# Altium PCB PCB2.PcbDoc
Units mil, origin at the board's own origin, x right, y up, seen from the top; angles counter-clockwise.
Board outline 6000 x 4000 mil, 2 copper layers (Top Layer, Bottom Layer); 15 components, 16 nets, 43 pads, 4 vias.
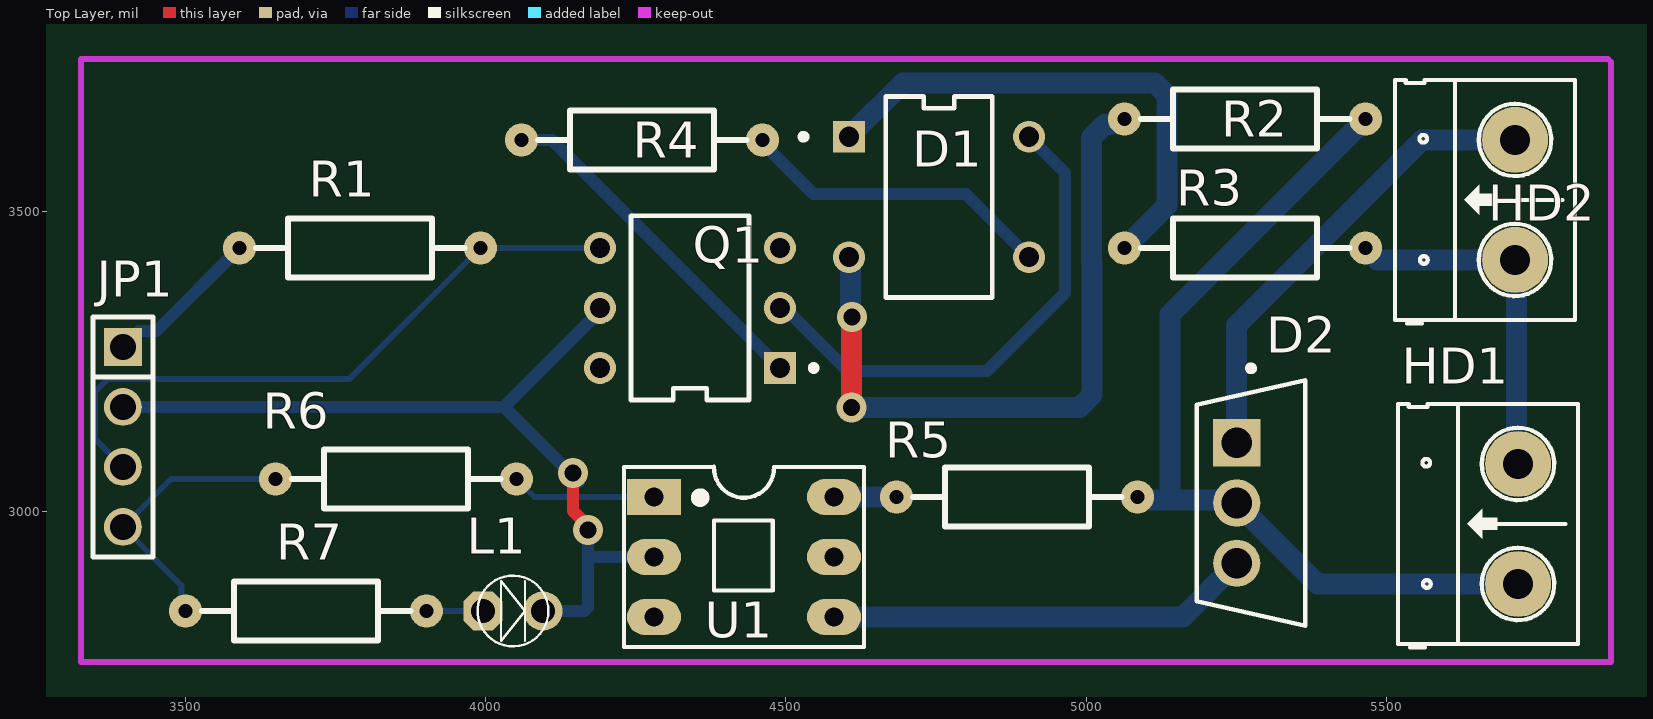
[diagram p0: Top Layer view]
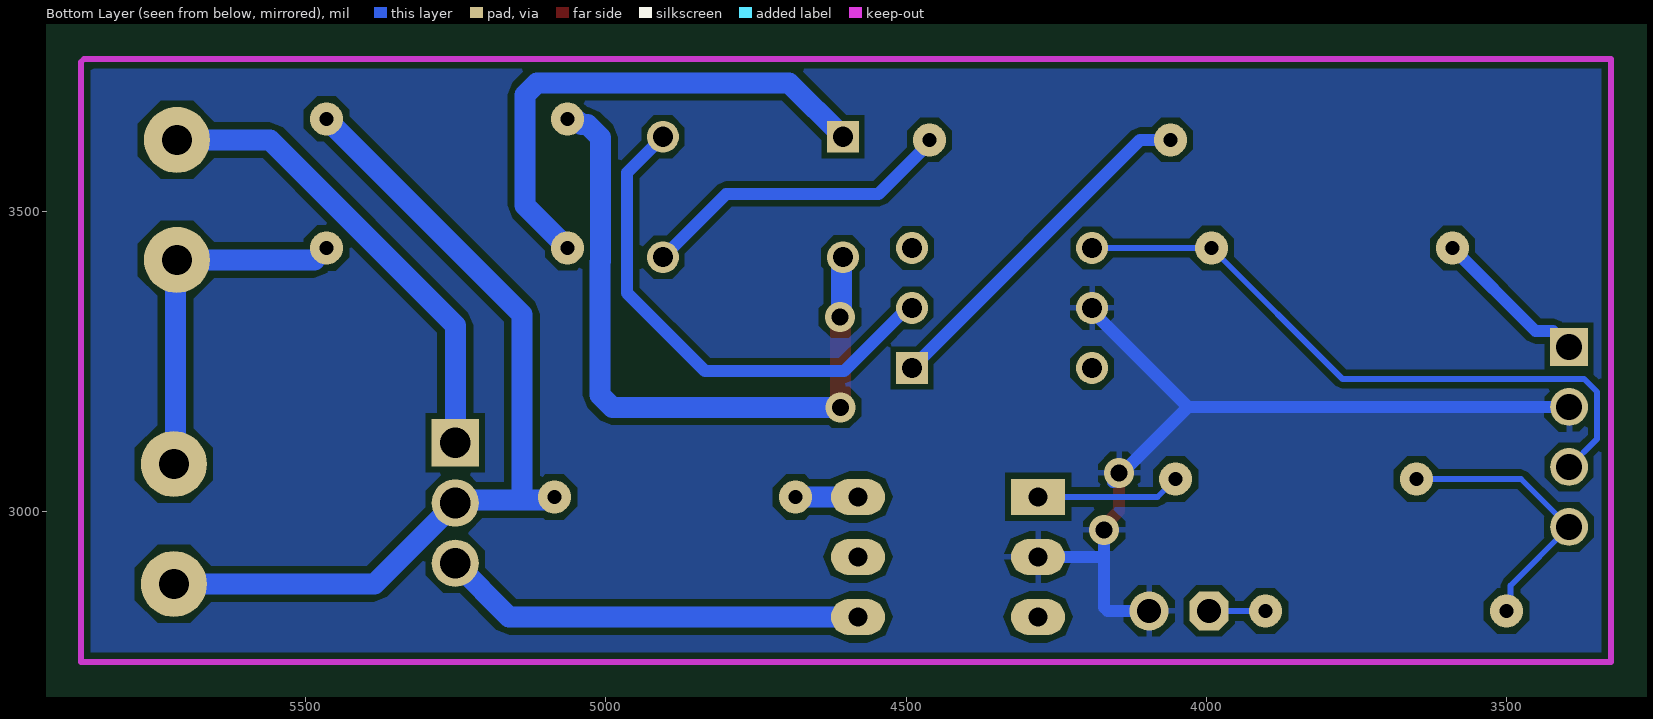
[diagram p1: Bottom Layer view, seen from below]
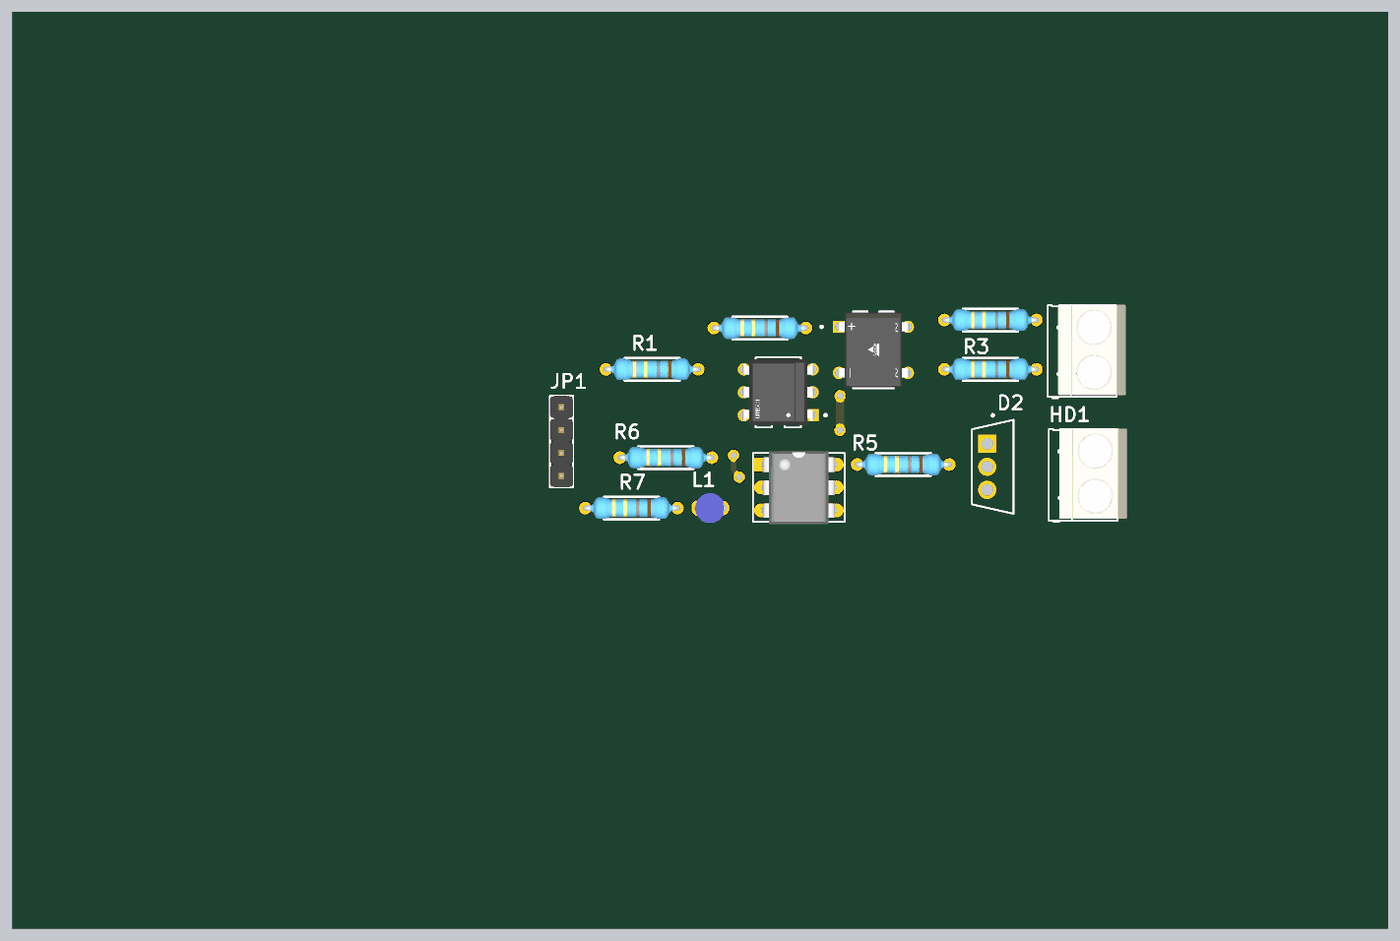
[diagram p2: 3D render of the assembled board from above, using the file's embedded part models]

## Layer stack, top to bottom
Top Solder: solder mask 0.4, Solder Resist, Dk 3.5
Top Layer: signal copper 1.4
Dielectric 1: dielectric 12.6, FR-4, Dk 4.8
Bottom Layer: signal copper 1.4
Bottom Solder: solder mask 0.4, Solder Resist, Dk 3.5

## Board outline
1000,1000 7000,1000 7000,5000 1000,5000

## Design rules (kind name [scope] priority, off if disabled: settings)
Clearance [All] p1: gap=10 ignorepadtopadclearanceinfootprint=FALSE
PolygonConnect [All] p1: connectstyle=Relief reliefconductorwidth=10 reliefentries=4 polygonreliefangle="90 Angle" airgapwidth=10
RoutingVias [All] p1: holewidth=28 width=50 viastyle="Through Hole" minholewidth=28 minwidth=50 maxholewidth=28 maxwidth=50
SolderMaskExpansion [All] p1: expansion=4 istentingtop=FALSE
Width [All] p1: maxlimit=10 minlimit=10 preferedwidth=10
30 further rules are at their usual default settings.

## Components (designator, comment, footprint, x,y, rotation, side; value= is the part's Value field where it differs from the comment)
D1 "DF04M-E3/45" FP-DF04M-E3-45-0 4755,3525 r0 top
D2 "BTA16-600CWRG" FP-TO-220AB_Ins-MFG 5275,3015 r0 top
HD1 "Header 2" HED2 5720,2880 r90 top
HD2 "Header 2" HED2 5715,3420 r90 top
JP1 "JP 1x4 2.54" "JP 1x4 DT" 3395,3275 r270 top
L1 "LED 3mm" LED-3MM-BLUE 4050,2835 r0 top
Q1 "4N25" FP-4N25-MFG 4340,3340 r180 top
R1 "10k" "tro vach 1/4w" 3790,3440 r0 top
R2 "47k" "tro vach 1/4w" 5265,3655 r0 top
R3 "47k" "tro vach 1/4w" 5265,3440 r0 top
R4 "10k" "tro vach 1/4w" 4260,3620 r0 top
R5 "1k" "tro vach 1/4w" 4885,3025 r0 top
R6 "330R" "tro vach 1/4w" 3850,3055 r0 top
R7 "220R" "tro vach 1/4w" 3700,2835 r0 top
U1 "MOC3021" DIP6/W0.3 4280,3025 r270 top

## Footprints (in the part's own frame and the unit in brackets; to place one, negate y for a bottom-side part, rotate by r counter-clockwise, add the part's x,y. Pads: shape width x height; smd on the part's side, far side on the other; paste and mask are expansions set on the pad)
DIP6/W0.3 [mil] "6 PIN, W 300mil, Pin to pin 100mil"
  rect 60x90 hole 31.5: 1(0,0)
  oval 60x90 hole 31.5: 2(100,0) 3(200,0) 4(200,300) 5(100,300) 6(0,300)
  silkscreen extent -50,-50 250,350, body extent -58,-7 260,307, height 170
FP-4N25-MFG [mm]
  rect 1.35x1.35 hole 0.85 paste-2539.97 mask+0: 1(-3.81,2.54)
  round 1.35 hole 0.85 paste-2539.97 mask+0: 2(-3.81,0) 3(-3.81,-2.54) 4(3.81,-2.54) 5(3.81,0) 6(3.81,2.54)
  silkscreen extent -5.36,-3.9 2.5,3.9, body extent -4.58,-4 4.58,4, height 0.25
FP-DF04M-E3-45-0 [mm]
  rect 1.35x1.35 hole 0.85 paste-2539.97 mask+0: 1(-3.81,2.55)
  round 1.35 hole 0.85 paste-2539.97 mask+0: 2(-3.81,-2.55) 3(3.81,-2.55) 4(3.81,2.55)
  silkscreen extent -5.86,-4.26 2.25,4.26, body extent -4.58,-4.36 4.58,4.36, height 0.25
FP-TO-220AB_Ins-MFG [mm]
  rect 2x2 hole 1.3 paste-2539.97 mask+0: 1(-0.608,2.55)
  round 2 hole 1.3 paste-2539.97 mask+0: 2(-0.608,0) 3(-0.608,-2.55)
  silkscreen extent -2.3,-5.2 2.3,5.82
HED2 [mil] "Header 2, 2 pin, hight 300mil, Pin to Pin 200, Colour Green"
  round 110 hole 50: 1(0,0) 2(200,0)
  silkscreen extent -106,-100 300,200, body extent -92,-140 302,155, height 394
"JP 1x4 DT" [mm] "4 pins, 1 row, straight, gold plating"
  rect 1.6x1.6 hole 1.1: 1(0,0)
  round 1.6 hole 1.1: 2(2.54,0) 3(5.08,0) 4(7.62,0)
  silkscreen extent -1.27,-1.27 8.89,1.27, body extent -1.27,-1.27 8.89,1.27, height 8.54
LED-3MM-BLUE [mil]
  oct 65x65 hole 40: 1(-55,0)
  round 65 hole 40: 2(45,0)
  silkscreen extent -64,-59 54,59, body extent -72,-65 54,65, height 184
"tro vach 1/4w" [mm]
  round 1.4 hole 0.6: 1(-5.1,0) 2(5.1,0)
  silkscreen extent -4.39,-1.25 4.42,1.25, body extent -5.38,-1.2 5.38,1.2, height 2.41

## Part data
D1: library part CMP-00030-42173530-1, "DF04M-E3/45 Rectifier Bridge Diode Single 400V 1A 4-Pin Case DFM Tube / BRIDGE RECT 1PHASE 400V 1A DFM", Average Rectified Current=1A, Breakdown Voltage=400V, Capacitance=25pF, Case/Package=DIP, Forward Voltage=1.1V, Max Forward Surge Current (Ifsm)=50A, Max Junction Temperature (Tj)=150°C, Max Reverse Leakage Current=5µA, Min Operating Temperature=-55°C, Current Rating=1A, Element Configuration=Single, Forward Current=1A, Height=3.3mm, Lead Free="Lead Free", Length=8.51mm, Max Operating Temperature=150°C, Max Repetitive Reverse Voltage (Vrrm)=400V, Max Surge Current=50A, Mount="Through Hole", NexarPartId=42173530, Number of Elements=1, Number of Pins=4, Peak Non-Repetitive Surge Current=50A, Peak Reverse Current=5µA, Radiation Hardening=No, REACH SVHC=Unknown, Reverse Voltage=400V, RoHS=Compliant, Schedule B="8541100080, 8541100080|8541100080|8541100080|8541100080|8541100080", Width=6.5mm
D2: library part CMP-12193-000001-1, "TRIAC ALTERNISTOR 600V TO220AB", Forward Voltage=1.55V, Gate Trigger Current=35mA, Gate Trigger Voltage=1.3V, Manufacturer=STMicroelectronics, Max Junction Temp=+125°C, Off State Voltage=600V, On State Current Rms=16A, PACKAGE="TO-220AB Ins", Temperature="-40°C to +125°C", Temperature Range Low=-40°C, Automotive=No, Category=Diode, ComponentLink2Description=Datasheet, ComponentLink2URL=https://www.st.com/resource/en/datasheet/bta16.pdf, Device Class L1="Discrete Semiconductors", Device Class L2=Thyristors, Device Class L3=TRIACs, Digikey Description="TRIAC ALTERNISTOR 600V TO220AB", Height=19.65mm, Hold Current=35mA, Ipc Land Pattern Name=TO-220, Lead Free=Yes, Manufacturer Part Number=BTA16-600CWRG, Mouser Description="Triacs 16 Amp 600 Volt", Octopart=https://octopart.com/bta16-600cwrg-stmicroelectronics-360233, RoHS=TRUE, Standoff Height=3.75mm, Temperature Range High=+125°C
HD1 HD2: library part Hed2, "Header 2 (Green)"
JP1: library part "JP 1x4 2.54 Duc Thang", "Cắm", Chung_Loai=Cắm, Don_Vi=Con, Ma_Hang=MH000903, Ten_Linh_Kien="Jump Đơn Đực 2.54MM 1x40P Thẳng 11MM"
L1: library part "LED 3mm Xanh Duong", "Cắm", Chung_Loai=Cắm, Don_Vi=Con, Ma_Hang=MH009003, Ten_Linh_Kien="LED 3MM Xanh Dương SS (1000c)"
Q1: library part CMP-22018-000009-1, "OPTOISO 2.5KV TRANS W/BASE 6DIP", Case/Package=PDIP, Collector Emitter Breakdown Voltage=30V, Collector Emitter Saturation Voltage=500mV, Current Transfer Ratio=50%, Forward Current=60mA, Forward Voltage=1.5V, Input Current=50mA, Isolation Voltage=5kV, Max Collector Current=100mA, Max Input Current=80mA, Max Operating Temperature=100°C, Max Power Dissipation=250mW, Min Operating Temperature=-55°C, Output Voltage=70V, Package Quantity=2000, Power Dissipation=150mW, Reverse Breakdown Voltage=5V, Collector Emitter Voltage (VCEO)=30V, Collector-emitter Voltage-Max=500mV, Fall Time=2us, Input Type=DC, Isolation Voltage-Max=5kV, Lead Free="Lead Free", Max Output Voltage=30V, Mount="Through Hole", Number of Channels=1, Number of Circuits=1, Number of Elements=1, Number of Pins=6, Output Current per Channel=100mA, Packaging=Rail/Tube, Radiation Hardening=No, Rise Time=2us, Series=-
R1 R4: library part "Tro Vach 1/4W 1% 10k", "Cắm", Chung_Loai=Cắm, Don_Vi=Con, Ma_Hang=MH006349, So_Chan=2, Ten_Linh_Kien="Trở Vạch 1/4w 1% 10k"
R2 R3: library part "Tro Vach 1/4W 5% 47k", "Cắm", Chung_Loai=Cắm, Don_Vi=Con, Ma_Hang=MH004982, So_Chan=2, Ten_Linh_Kien="Trở Vạch 1/4w 5% 47k"
R5: library part "Tro Vach 1/4W 5% 1k", "Cắm", Chung_Loai=Cắm, Don_Vi=Con, Ma_Hang=MH007390, So_Chan=2, Ten_Linh_Kien="Trở Vạch 1/4w 5% 1k"
R6: library part "Tro Vach 1/4W 1% 330R", "Cắm", Chung_Loai=Cắm, Don_Vi=Con, Ma_Hang=MH006348, So_Chan=2, Ten_Linh_Kien="Trở Vạch 1/4w 1% 330R"
R7: library part "Tro Vach 1/4W 5% 220R", "Cắm", Chung_Loai=Cắm, Don_Vi=Con, Ma_Hang=MH007300, So_Chan=2, Ten_Linh_Kien="Trở Vạch 1/4w 5% 220R"
U1: "Single Opto"

## Via types
v1: diameter 50, hole 28, Top Layer to Bottom Layer, 4 vias

## Nets (pads, with @x,y where several pads share a name; then routed paths per layer and width w, separated by ;. In a path a pad name is that pad's centre, name@x,y a point inside that pad or via, vN(x,y) a via of type N, cw(c..) or ccw(c..) an arc to the next point about the centre after c; other vN are vias at no path point)
5V: JP1.1 R1.1 | length 273.3
  Bottom Layer w10: JP1.1 JP1.1@3421.5,3301.5 ; R1.1@3589.21,3424.21 R1.1@3589.21,3435
  Bottom Layer w20: JP1.1@3421.5,3301.5 3450.71,3301.5 R1.1
GND: JP1.2 L1.2 Q1.5 U1.2 | length 1479.1
  Top Layer w10: v1(4170,2970) v1@4170,2976.57
  Top Layer w20: v1(4145,3065) 4145,3001.57 v1@4170,2976.57
  Bottom Layer w10: 4164.14,2835 4170,2840.86 ; 4170,2930 4175,2925 ; v1(4170,2970) v1@4170,2980
  Bottom Layer w20: JP1.2 4030,3175 ; L1.2 4164.14,2835 ; v1@4155,3050 4030,3175 ; 4170,2840.86 4170,2930 v1(4170,2970) ; 4175,2925 U1.2 ; Q1.5@4195,3340 4030,3175
NetD1_1: D1.1 R3.1 | length 859.7
  Bottom Layer w35: D1.1 4694.61,3715 5115,3715 5135,3695 5135,3510.79 R3.1
NetD1_2: D1.2 R2.1 | length 1164.3
  Top Layer w10: v1(4609.14,3174.14) v1@4609.57,3174.57 ; v1@4609.57,3324.57 v1(4610,3325)
  Top Layer w30: v1(4610,3325) v1@4612.5,3322.5
  Top Layer w35: v1@4609.57,3174.57 v1@4609.57,3324.57
  Bottom Layer w30: D1.2 D1.2@4607.5,3422.11 ; v1@4607.5,3327.5 v1(4610,3325) ; R2.1@5059.41,3650.19 R2.1
  Bottom Layer w35: v1@4607.5,3327.5 D1.2@4607.5,3422.11 ; v1(4609.14,3174.14) 4989.5,3174.14 5010,3194.64 5010,3416.35 5009.15,3417.19 5009.15,3624.14 5030.5,3645.49 5040.48,3645.49 5046.14,3651.15 5058.45,3651.15 R2.1@5059.41,3650.19
NetD1_3: D1.3 R4.2 | length 537.2
  Bottom Layer w20: R4.2@4450.79,3625 4545.79,3530 4799.61,3530 D1.3
NetD1_4: D1.4 Q1.2 | length 857.6
  Bottom Layer w10: Q1.2 Q1.2@4498.01,3340
  Bottom Layer w20: Q1.2@4498.01,3340 4563.01,3275 4603.01,3235 4835,3235 4965,3365 4965,3565.39 D1.4
NetD2_1: D2.1 HD2.2 | length 787.6
  Bottom Layer w35: D2.1 5251.08,3311.08 5560,3620 HD2.2
NetD2_2: D2.2 HD1.1 R2.2 R5.2 | length 1491.3
  Bottom Layer w10: R5.2 R5.2@5090.79,3020 ; 5140,3025 5145,3020 ; D2.2@5246.08,3020 D2.2
  Bottom Layer w35: R5.2@5090.79,3020 5145,3020 D2.2@5246.08,3020 ; 5140,3025 5140,3329.21 R2.2 ; D2.2 5386.08,2880 HD1.1@5745,2880
NetD2_3: D2.3 U1.4 | length 708.2
  Bottom Layer w35: U1.4 5161.48,2825 D2.3
NetHD1_2: HD1.2 HD2.1 R3.2 | length 599.6
  Bottom Layer w10: R3.2 5485.79,3420 ; HD2.1 HD2.1@5717.5,3417.5 ; HD1.2@5717.5,3082.5 HD1.2
  Bottom Layer w35: 5485.79,3420 HD2.1 ; HD1.2@5717.5,3082.5 HD2.1@5717.5,3417.5
NetL1_1: L1.1 R7.2 | length 94.2
  Bottom Layer w10: R7.2 L1.1
NetQ1_1: Q1.1 R4.1 | length 588.2
  Bottom Layer w20: R4.1 4110,3620 Q1.1
NetR5_1: R5.1 U1.6 | length 104.2
  Bottom Layer w35: U1.6 R5.1
NetR6_2: R6.2 U1.1 | length 241.6
  Bottom Layer w10: R6.2 4080.79,3025 U1.1
PWM: JP1.4 R6.1 R7.1 | length 470.5
  Bottom Layer w10: R7.1 3492.44,2841.77 3492.44,2877.56 JP1.4 3475,3055 R6.1
ZC: JP1.3 Q1.4 R1.2 | length 1090.9
  Bottom Layer w10: JP1.3 3348,3122 3348,3200 3370,3222 3772.79,3222 R1.2 Q1.4 Q1.4@4195,3440
pads on no net: Q1.3 Q1.6 U1.3 U1.5

## Polygon pours and split planes (outlines as drawn)
GND on Bottom Layer "GND_L02_P000" (solid, remove dead copper, pour order 0): 3330,3750 3335,3755 5870,3755 5870,2755 5875,2750 3325,2750

## Keep-outs
Keep-Out Layer:
  lines w10: 3340,3755 5855,3755 5870,3755 5875,3750 5875,2750 3325,2750 3325,3755 3350,3755